# Altium PCB PCB1.PcbDoc
Units mil, origin at the board's own origin, x right, y up, seen from the top; angles counter-clockwise.
Board outline 2475 x 1365 mil, 2 copper layers (Top Layer, Bottom Layer); 25 components, 24 nets, 103 pads, 19 vias.
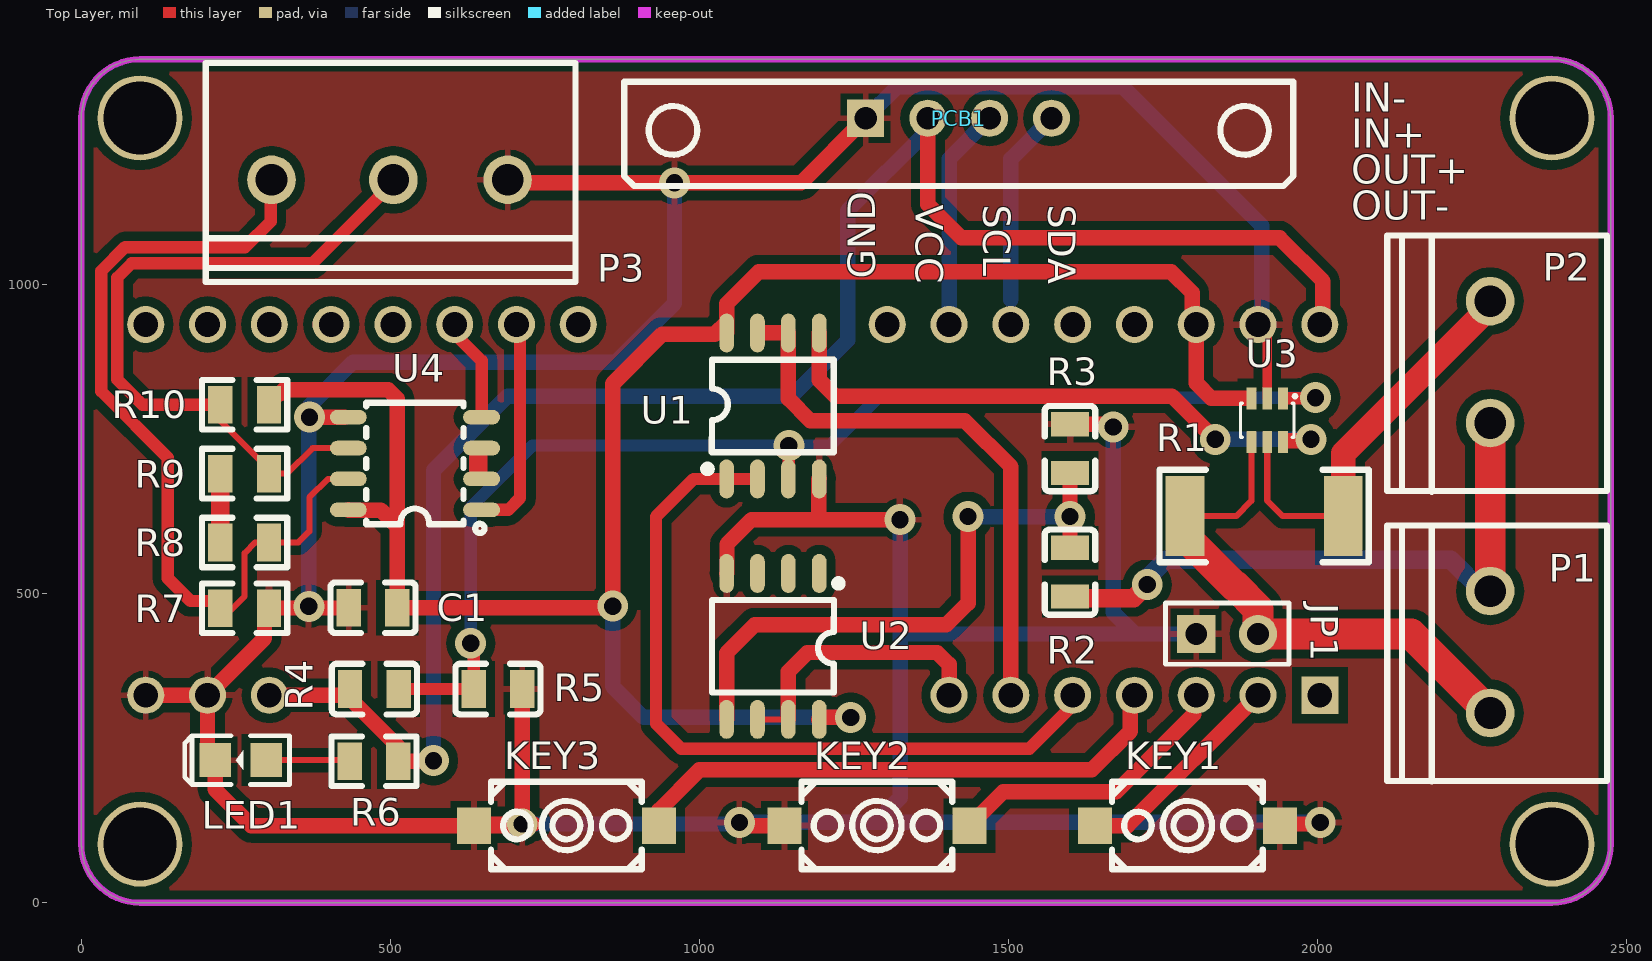
[diagram p0: Top Layer view]
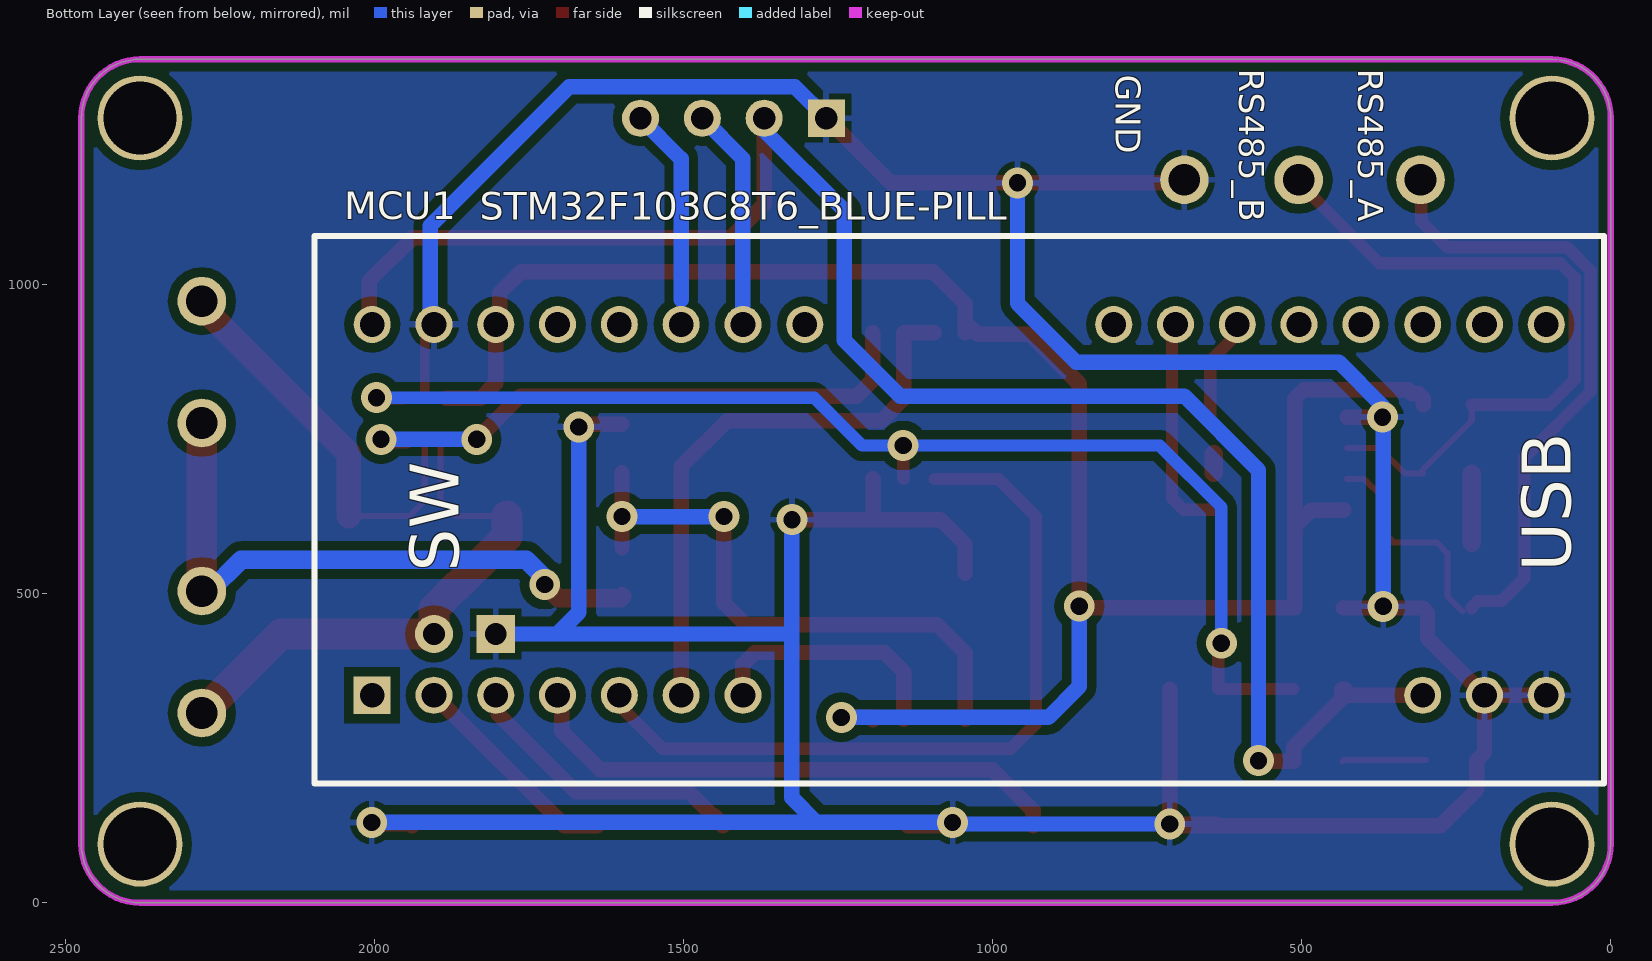
[diagram p1: Bottom Layer view, seen from below]

## Layer stack, top to bottom
Top Solder: solder mask 0.4, Solder Resist, Dk 3.5
Top Layer: signal copper 1.4
Dielectric 1: dielectric 12.6, FR-4, Dk 4.8
Bottom Layer: signal copper 1.4
Bottom Solder: solder mask 0.4, Solder Resist, Dk 3.5

## Board outline
0,95 ccw(c95,95) 95.34,0 2380,0 ccw(c2380,95) 2475,95.34 2475,95 2475,1270 ccw(c2380,1270) 2379.66,1365 2380,1365 95,1365 ccw(c95,1270) 0,1269.66

## Design rules (kind name [scope] priority, off if disabled: settings)
Clearance Clearance_11 [InNamedPolygon('GND_L02_P001')] p1: gap=15 ignorepadtopadclearanceinfootprint=FALSE except(0: Arc-Hole Track-Hole SMDPad-Hole THPad-Hole Via-Hole Fill-Hole Poly-Hole Region-Hole Text-Hole)
Clearance Clearance_10 [InNamedPolygon('GND_L01_P000')] p2: gap=15 ignorepadtopadclearanceinfootprint=FALSE except(0: Arc-Hole Track-Hole SMDPad-Hole THPad-Hole Via-Hole Fill-Hole Poly-Hole Region-Hole Text-Hole)
Clearance Clearance_9 [InNamedPolygon('Top Layer-No Net')] p3: gap=10 ignorepadtopadclearanceinfootprint=FALSE except(0: Arc-Hole Track-Hole SMDPad-Hole THPad-Hole Via-Hole Fill-Hole Poly-Hole Region-Hole Text-Hole)
Clearance Clearance_8 [InNamedPolygon('Top Layer-No Net')] p4: gap=10 ignorepadtopadclearanceinfootprint=FALSE except(0: Arc-Hole Track-Hole SMDPad-Hole THPad-Hole Via-Hole Fill-Hole Poly-Hole Region-Hole Text-Hole)
Clearance Clearance_7 [InNamedPolygon('Top Layer-No Net')] p5: gap=16 ignorepadtopadclearanceinfootprint=FALSE except(0: Arc-Hole Track-Hole SMDPad-Hole THPad-Hole Via-Hole Fill-Hole Poly-Hole Region-Hole Text-Hole)
Clearance Clearance_6 [InNamedPolygon('Top Layer-No Net')] p6: gap=18 ignorepadtopadclearanceinfootprint=FALSE except(0: Arc-Hole Track-Hole SMDPad-Hole THPad-Hole Via-Hole Fill-Hole Poly-Hole Region-Hole Text-Hole)
Clearance Clearance_5 [InNamedPolygon('Top Layer-No Net')] p7: gap=20 ignorepadtopadclearanceinfootprint=FALSE except(0: Arc-Hole Track-Hole SMDPad-Hole THPad-Hole Via-Hole Fill-Hole Poly-Hole Region-Hole Text-Hole)
Clearance Clearance_4 [InNamedPolygon('Top Layer-No Net')] p8: gap=10 ignorepadtopadclearanceinfootprint=FALSE except(0: Arc-Hole Track-Hole SMDPad-Hole THPad-Hole Via-Hole Fill-Hole Poly-Hole Region-Hole Text-Hole)
Clearance Clearance_3 [InNamedPolygon('Top Layer-No Net')] p9: gap=10 ignorepadtopadclearanceinfootprint=FALSE except(0: Arc-Hole Track-Hole SMDPad-Hole THPad-Hole Via-Hole Fill-Hole Poly-Hole Region-Hole Text-Hole)
Clearance Clearance_2 [InNamedPolygon('Top Layer-No Net')] p10: gap=20 ignorepadtopadclearanceinfootprint=FALSE except(0: Arc-Hole Track-Hole SMDPad-Hole THPad-Hole Via-Hole Fill-Hole Poly-Hole Region-Hole Text-Hole)
Clearance Clearance_1 [InNamedPolygon('Top Layer-No Net1')] p11: gap=20 ignorepadtopadclearanceinfootprint=FALSE except(0: Arc-Hole Track-Hole SMDPad-Hole THPad-Hole Via-Hole Fill-Hole Poly-Hole Region-Hole Text-Hole)
Clearance [All] p12: gap=6 ignorepadtopadclearanceinfootprint=FALSE except(0: Arc-Hole Track-Hole SMDPad-Hole THPad-Hole Via-Hole Fill-Hole Poly-Hole Region-Hole Text-Hole)
PolygonConnect [All] p1: connectstyle=Relief reliefconductorwidth=10 reliefentries=4 polygonreliefangle="90 Angle" airgapwidth=10
RoutingVias [All] p1: holewidth=28 width=50 viastyle="Through Hole" minholewidth=28 minwidth=50 maxholewidth=28 maxwidth=50
SolderMaskExpansion [All] p1: expansion=4
Width [All] p1: maxlimit=50 minlimit=5 preferedwidth=10
30 further rules are at their usual default settings.

## Components (designator, comment, footprint, x,y, rotation, side; value= is the part's Value field where it differs from the comment)
C1 "0.1u" C0805 472.13,477.44 r0 top
JP1 "JUMPER" HDR-F-2.54_1X2 1854.26,435 r0 top
KEY1 "K2-3.6×6.1_SMD" KEY-SMD_2P-L6.2-W3.6-LS8.0 1790,125 r180 top
KEY2 "K2-3.6×6.1_SMD" KEY-SMD_2P-L6.2-W3.6-LS8.0 1287.5,125 r0 top
KEY3 "K2-3.6×6.1_SMD" KEY-SMD_2P-L6.2-W3.6-LS8.0 785,125 r0 top
LED1 "LED-0805_G" LED0805_GREEN 257.91,230.9 r180 top
MCU1 "STM32F103C8T6_BLUE-PILL" STM32F103C8T6_BLUE-PILL 2004.26,335.9 r90 bottom locked
P1 "CONN-TH_2P-P5.00" CONN-TH_2P-P5.00 2280,405.77 r90 top
P2 "CONN-TH_2P-P5.00" CONN-TH_2P-P5.00 2280,874.93 r90 top
P3 "CONN-TH_2P-P5.00" CONN-TH_2P-P5.00 406.4,1170 r180 top
PCB1 "SSD1306-128x64-OLED-I2C" SSD1306_GNDVCC 878.67,236.14 r0 top
R1 "0.01" R2512 1914.26,625.9 r180 top
R2 "30k" C0805 1600,535 r270 top
R3 "10k" C0805 1600,735 r270 top
R4 "10k" C0805 474.26,345.9 r180 top
R5 "10k" C0805 674.26,345.9 r180 top
R6 "1K" R0805 473.63,229.05 r0 top
R7 "3.3K" R0805 264.26,476.65 r180 top
R8 "0" R0805 264.26,583.07 r0 top
R9 "120" R0805 264.26,694.48 r180 top
R10 "3.3K" R0805 264.26,805.9 r0 top
U1 "LM358" SOP-8_L4.9-W3.9-P1.27-LS6.0-BL 1119.26,804.01 r0 top
U2 "LM358" SOP-8_L4.9-W3.9-P1.27-LS6.0-BL 1119.26,414.96 r180 top
U3 "INA199A1DCKR" SOT-363_L2.0-W1.3-P0.65-LS2.1-BR 1919.26,780.9 r90 top
U4 "MAX13487EESA" SOIC-8_L4.9-W3.9-P1.27-LS6.0-BL 539.99,710.9 r90 top

## Footprints (in the part's own frame and the unit in brackets; to place one, negate y for a bottom-side part, rotate by r counter-clockwise, add the part's x,y. Pads: shape width x height; smd on the part's side, far side on the other; paste and mask are expansions set on the pad)
C0805 [mm]
  rect 1x1.55 smd: 1(-1,0) 2(1,0)
  silkscreen extent -1.75,-1.04 1.75,1.04
CONN-TH_2P-P5.00 [mm]
  round 2 hole 1.3: 1(-2.504,0) 2(2.504,0)
  silkscreen extent -5.32,-4.8 5.21,4.23
HDR-F-2.54_1X2 [mil]
  rect 62x62 hole 35: 1(-50,0)
  round 62 hole 35: 2(50,0)
  silkscreen extent -100,-49 100,50
KEY-SMD_2P-L6.2-W3.6-LS8.0 [mm]
  rect 1.4x1.5 smd: 1(-3.8,0) 2(3.8,0)
  silkscreen extent -3.1,-1.8 3.1,1.8
LED0805_GREEN [mil]
  rect 51.2x55.1 smd: 1(-41.35,0) 2(41.35,0)
  silkscreen extent -79,-39 91,39
R0805 [mm]
  rect 1x1.55 smd: 1(-1,0) 2(1,0)
  silkscreen extent -1.75,-1.02 1.75,1.02
R2512 [mm]
  rect 1.6x3.3 smd: 1(-3.25,0) 2(3.25,0)
  silkscreen extent -4.3,-1.9 4.3,1.9
SOIC-8_L4.9-W3.9-P1.27-LS6.0-BL [mm]
  oval 0.6x1.518 smd: 1(-1.905,-2.74) 2(-0.635,-2.74) 3(0.635,-2.74) 4(1.905,-2.74) 5(1.905,2.74) 6(0.635,2.74) 7(-0.635,2.74) 8(-1.905,2.74)
  silkscreen extent -2.86,-2.86 2.5,2
SOP-8_L4.9-W3.9-P1.27-LS6.0-BL [mm]
  oval 0.6x1.598 smd: 1(-1.905,-3) 2(-0.635,-3) 3(0.635,-3) 4(1.905,-3) 5(1.905,3) 6(0.635,3) 7(-0.635,3) 8(-1.905,3)
  silkscreen extent -2.84,-2.74 2.5,1.9
SOT-363_L2.0-W1.3-P0.65-LS2.1-BR [mm]
  rect 0.9x0.4 smd: 1(0.9,-0.65) 2(0.9,0) 3(0.9,0.65) 4(-0.9,0.65) 5(-0.9,0) 6(-0.9,-0.65)
  silkscreen extent -0.7,-1.21 1.06,1.1
SSD1306_GNDVCC [mil]
  rect 60x60 hole 36: 1(390.59,1033.48)
  round 60 hole 36: 2(491.3,1033.5) 3(591.3,1033.5) 4(691.3,1033.5)
  silkscreen extent 0,924 1083,1093
STM32F103C8T6_BLUE-PILL [mil]
  rect 60x60 hole 40: 1(0,0)
  round 60 hole 40: 2(0,-100) 3(0,-200) 4(0,-300) 5(0,-400) 6(0,-500) 7(0,-600) 18(0,-1700) 19(0,-1800) 20(0,-1900) 21(600,-1900) 22(600,-1800) 23(600,-1700) 24(600,-1600) 25(600,-1500) 26(600,-1400) 27(600,-1300) 28(600,-1200) 33(600,-700) 34(600,-600) 35(600,-500) 36(600,-400) 37(600,-300) 38(600,-200) 39(600,-100) 40(600,0)
  silkscreen extent -143,-1993 743,93

## Part data
R2: library part 3k
R3: library part 1k

## Free pads (board coordinates)
  round 137.8 hole 118.11: 0(95,95) 0(95,1270) 0(2380,95) 0(2380,1270)
  round 78.5 hole 51: _0(690,1170)

## Via types
v1: diameter 50, hole 28, Top Layer to Bottom Layer, 19 vias

## Nets (pads, with @x,y where several pads share a name; then routed paths per layer and width w, separated by ;. In a path a pad name is that pad's centre, name@x,y a point inside that pad or via, vN(x,y) a via of type N, cw(c..) or ccw(c..) an arc to the next point about the centre after c; other vN are vias at no path point)
+5V: C1.2 MCU1.38 R10.2 U1.8 U2.8 U3.3 U4.8 | length 3240.8
  Top Layer w25: R10.2 303.63,816.73 310.82,823.91 321.64,823.91 327.73,830 496.86,830 511.5,815.36 511.5,608.5 ; U4.8 432.81,635.21 484.79,635.21 511.5,608.5 ; v1@842.44,477.44 C1.2 511.5,608.5 ; v1(860,480) 860,840 940,920 1024.95,920 U1.8@1044.26,939.31 ; U1.8 U1.8@1044.26,939.31 ; U2.8@1193.57,296.16 U2.8 1194.26,299.31 1194.95,300 v1(1245,300) ; 1884.26,816.33 1828.83,816.33 1804.26,840.9 MCU1.38 1797.57,942.6 1797.57,987.43 1763.88,1021.12 1096.12,1021.12 1044.26,969.26 U1.8@1044.26,939.31
  Bottom Layer w25: v1(860,480) 860,350 910,300 v1(1245,300)
ADC0: MCU1.5 U1.1 U1.2 | length 1261.8
  Top Layer w20: U1.2 U1.1 990.9,685.9 930,625 930,290 970.61,249.39 1534.39,249.39 1605,320 1605,335.16 MCU1.5
ADC1: MCU1.6 U1.6 U1.7 | length 931.8
  Top Layer w25: U1.7 U1.6 1144.26,815.74 1180,780 1430,780 1504.26,705.74 MCU1.6
ADC2: MCU1.7 U2.6 U2.7 | length 458
  Top Layer w10: U2.6 U2.7
  Top Layer w25: U2.7 1144.26,374.26 1175,405 1385,405 1404.26,385.74 MCU1.7
GND: C1.1 JP1.1 KEY1.1 KEY2.1 KEY3.1 LED1.2 MCU1.19 MCU1.20 MCU1.39 pad._0 PCB1.1 R3.1 R5.1 R7.1 U1.4 U2.4 U3.2 U4.5 | length 7572.3
  Top Layer w15: MCU1.39@1904.26,930.9 1919.26,915.9 U3.2
  Top Layer w25: MCU1.20 MCU1.19 ; v1(368.2,479.69) v1@368.2,477.05 ; v1(369.26,785.9) U4.5@426.39,785.9 ; C1.1 432.37,477.05 v1@368.2,477.05 ; pad._0 695,1165 v1(960,1165) 1164.64,1165 PCB1.1 ; R5.1 v1(713.63,127.5) ; v1@732.5,127.5 v1(713.63,127.5) ; U2.4 1044.95,533.76 1044.95,580.36 1084.6,620 1185,620 ; v1(1065,130) 1070,125 KEY2.1 ; U1.4 1193.57,685.21 1193.57,628.57 1185,620 ; v1(1325,620) 1185,620 ; R3.1 1665.63,774.37 v1(1670,770) ; MCU1.39@1904.26,930.9 MCU1.39 ; KEY1.1 1942.11,127.5 2002.5,127.5 v1(2005,130) ; MCU1.19 296.45,428.08 296.45,469.47 R7.1 304.03,477.05 v1@368.2,477.05 ; MCU1.19 204.26,243.2 LED1.2 216.56,183.44 275,125 KEY3.1 ; KEY3.1 637.89,127.5 v1(713.63,127.5) ; KEY3.1 713.63,125 v1(713.63,127.5)
  Bottom Layer w25: v1(368.2,479.69) 368.2,784.84 v1(369.26,785.9) 369.26,804.26 440,875 865,875 960,970 v1(960,1165) ; v1(713.63,127.5) 1062.5,127.5 v1(1065,130) 1285,130 ; PCB1.1 1320.54,1320.9 1685,1320.9 1910,1095.9 MCU1.39@1910,933.4 ; v1(1325,620) 1325,435 ; v1(1670,770) 1670,470 1705,435 ; JP1.1 1705,435 ; v1(2005,130) 1285,130 ; 1285,130 1325,170 1325,435 ; 1325,435 1705,435
I2C_SCL: MCU1.34 PCB1.3 | length 361
  Bottom Layer w25: MCU1.34 1404.26,1203.93 PCB1.3
I2C_SDA: MCU1.35 PCB1.4 | length 321
  Bottom Layer w25: 1504.26,975.9 1504.26,1203.93 PCB1.4
NetJP1_2: JP1.2 P1.1 R1.2 U3.4 | length 881.8
  Top Layer w10: R1.2 1869.26,625.9 1893.67,650.31 U3.4
  Top Layer w50: R1.2 1786.31,592.43 1866.26,512.48 1867.52,512.48 1904.26,475.74 JP1.2 2152.17,435 P1.1
NetKEY1_2: KEY1.2 MCU1.2 | length 351.2
  Top Layer w25: KEY1.2 1693.36,125 MCU1.2
NetKEY2_2: KEY2.2 MCU1.3 | length 471.3
  Top Layer w25: KEY2.2 1437.1,126.97 1452.16,142.02 1454.13,142.02 1492.11,180 1675,180 1800,305 1800,331.64 MCU1.3
NetKEY3_2: KEY3.2 MCU1.4 | length 901.7
  Top Layer w25: KEY3.2 934.61,149.61 1000,215 1635,215 1697.57,277.57 1697.57,329.2 MCU1.4
NetLED1_1: LED1.1 R6.1 | length 135.8
  Top Layer w10: LED1.1 432.41,230.9 R6.1
NetP2_2: P2.2 R1.1 U3.5 | length 674
  Top Layer w10: U3.5 1919.26,650.9 1944.26,625.9 R1.1
  Top Layer w30: P2.2@2280,964.95 P2.2
  Top Layer w40: R1.1 2042.22,727.16 P2.2@2280,964.95
NetR8_1: R8.1 R9.2 | length 111.4
  Top Layer w30: R8.1 R9.2
NetU4_2: U4.2 U4.3 | length 30
  Top Layer w30: U4.2@642.14,695.9 U4.3@642.14,725.9
out0: U1.5 U3.6 | length 953.2
  Top Layer w25: U1.5 1194.26,845.74 1220,820 1765,820 v1(1835,750) ; U3.6@1949.48,747.73 1987.73,747.73 v1(1990,750)
  Bottom Layer w25: v1(1835,750) v1(1990,750)
out1: R2.1 R3.2 U2.5 | length 957.9
  Top Layer w25: U2.5 1044.26,404.26 1090,450 1400,450 1435,485 v1(1435,625) ; R2.1 v1(1600,625) R3.2
  Bottom Layer w25: v1(1435,625) v1(1600,625)
REF: R4.1 R5.2 U1.3 U3.1 | length 1955.6
  Top Layer w20: R4.1 R5.2 634.89,415.11 v1(630,420) ; U1.3 1144.63,686.27 1144.63,739.63 v1(1145,740) ; 1955,816.33 1996.33,816.33 v1(1997.42,817.42)
  Bottom Layer w20: v1(630,420) 630,640 730,740 v1(1145,740) 1211.72,740 1289.13,817.42 v1(1997.42,817.42)
RS485_A: P3.2 R7.2 R8.2 U4.7 | length 1376
  Top Layer w10: R7.2@240.01,471.65 264.26,495.9 264.26,565.9 281.43,583.07 R8.2 351.43,583.07 369.26,600.9 369.26,655.9 399.26,685.9 U4.7@426.39,685.9
  Top Layer w20: R7.2 224.89,478.6 215.21,488.28 176.72,488.28 140,525 140,720 32.26,827.74 32.26,1022.32 70.95,1061 265,1061 306.56,1102.56 306.56,1158.76 P3.2@317.8,1170
RS485_B: P3.1 R9.1 R10.1 U4.6 | length 1151.6
  Top Layer w10: R10.1 224.89,780.11 303.63,701.37 R9.1 332.85,694.48 374.26,735.9 U4.6@426.39,735.9
  Top Layer w20: R10.1 99.1,805.9 58.26,846.74 58.26,1011.55 81.72,1035 374.05,1035 509.05,1170 P3.1@511.9,1170
RXD: MCU1.27 U4.1 | length 354.3
  Top Layer w20: U4.1@641.44,636.59 U4.1@642.14,635.9 ; U4.1 690.9,635.9 710,655 710,930.16 MCU1.27
TXD: MCU1.26 U4.4 | length 175.9
  Top Layer w20: MCU1.26 604.26,920.74 647.86,877.14 U4.4 653.33,785.9 U4.4@655,787.57
V3.3: MCU1.18 MCU1.40 PCB1.2 R4.2 R6.2 | length 2885.1
  Top Layer w25: MCU1.18 R4.2@434.89,335.9 ; R4.2@429.89,345.9 R4.2@434.89,340.9 ; R4.2 R4.2@434.89,340.9 ; v1(570,230) 569.05,229.05 R6.2 513,252.16 434.89,330.27 R4.2@434.89,335.9 ; PCB1.2 1370,1130 1424.1,1075.9 1939.26,1075.9 2009.26,1005.9 MCU1.40@2009.26,935.9 ; R4.2@434.89,335.9 R4.2@434.89,340.9
  Bottom Layer w25: v1(570,230) 570,700 690,820 1150,820 1240,910 1240,1120 1369.97,1249.97 PCB1.2
V_IN+: P1.2 P2.1 R2.2 | length 1005.7
  Top Layer w30: R2.2 1602.82,492.81 1702.82,492.81 v1(1725,515)
  Top Layer w50: P1.2 P2.1
  Bottom Layer w30: v1(1725,515) 1725,525 1755,555 2216.18,555 2266.81,504.37 P1.2
pads on no net: MCU1.1 MCU1.21 MCU1.22 MCU1.23 MCU1.24 MCU1.25 MCU1.28 MCU1.33 MCU1.36 MCU1.37 U2.1 U2.2 U2.3
copper on no net: | length 26.6
  Top Layer w10: 504.26,935.9 515.84,935.9
  Top Layer w30: 389.26,935.9 404.26,935.9

## Polygon pours and split planes (outlines as drawn)
GND on Top Layer "GND_L01_P000" (solid, remove dead copper, pour order 0): 0,95 ccw(c95,95) 95.34,0 2380,0 ccw(c2380,95) 2475,95.34 2475,95 2475,1270 ccw(c2380,1270) 2379.66,1365 2380,1365 95,1365 ccw(c95,1270) 0,1269.66
GND on Bottom Layer "GND_L02_P001" (solid, pour order 1): 0,95 ccw(c95,95) 95.34,0 2380,0 ccw(c2380,95) 2475,95.34 2475,95 2475,1270 ccw(c2380,1270) 2379.66,1365 2380,1365 95,1365 ccw(c95,1270) 0,1269.66

## Keep-outs
Keep-Out Layer:
  lines w10: 2379.66,1365 cw(c2380,1270) 2475,1270 2475,95 ; 2380,1365 95,1365 ccw(c95,1270) 0,1269.66 0,95 ccw(c95,95) 95.34,0 2380,0 ccw(c2380,95) 2475,95.34

## Silkscreen, mask and mechanical layers (free items; w line width, h text height)
Top Overlay:
  lines w10: 878.67,1328.66 878.67,1175.9 894.42,1160.15 ; 1945.6,1160.15 1961.35,1175.9 1961.35,1328.66
  text "IN-" at 2055,1265 h80
  text "IN+" at 2055,1206.67 h80
  text "OUT+" at 2055,1148.33 h80
  text "OUT-" at 2055,1090 h80
Bottom Overlay:
  text "RS485_A" at 422.64,1350 h70 r90
  text "RS485_B" at 615,1350 h70 r90
  text "GND" at 815,1340 h70 r90
Mechanical 1:
  lines w10: 2379.66,1365 cw(c2380,1270) 2475,1270 2475,95 ; 2380,1365 95,1365 ccw(c95,1270) 0,1269.66 0,95 ccw(c95,95) 95.34,0 2380,0 ccw(c2380,95) 2475,95.34

## Text inside footprints (layer, text, board x,y; h text height)
MCU1: Bottom Overlay "SW" at 1864.26,535.9 h80 r270; Bottom Overlay "USB" at 64.26,535.9 h80 r270
PCB1: Top Overlay "SCL" at 1460,1130 h45 r270; Top Overlay "SDA" at 1565,1130 h45 r270; Top Overlay "GND" at 1285,1010.04 h45 r90; Top Overlay "VCC" at 1350,1130 h45 r270